# EAGLE board ActuatorBoard (EAGLE 9.6.2)
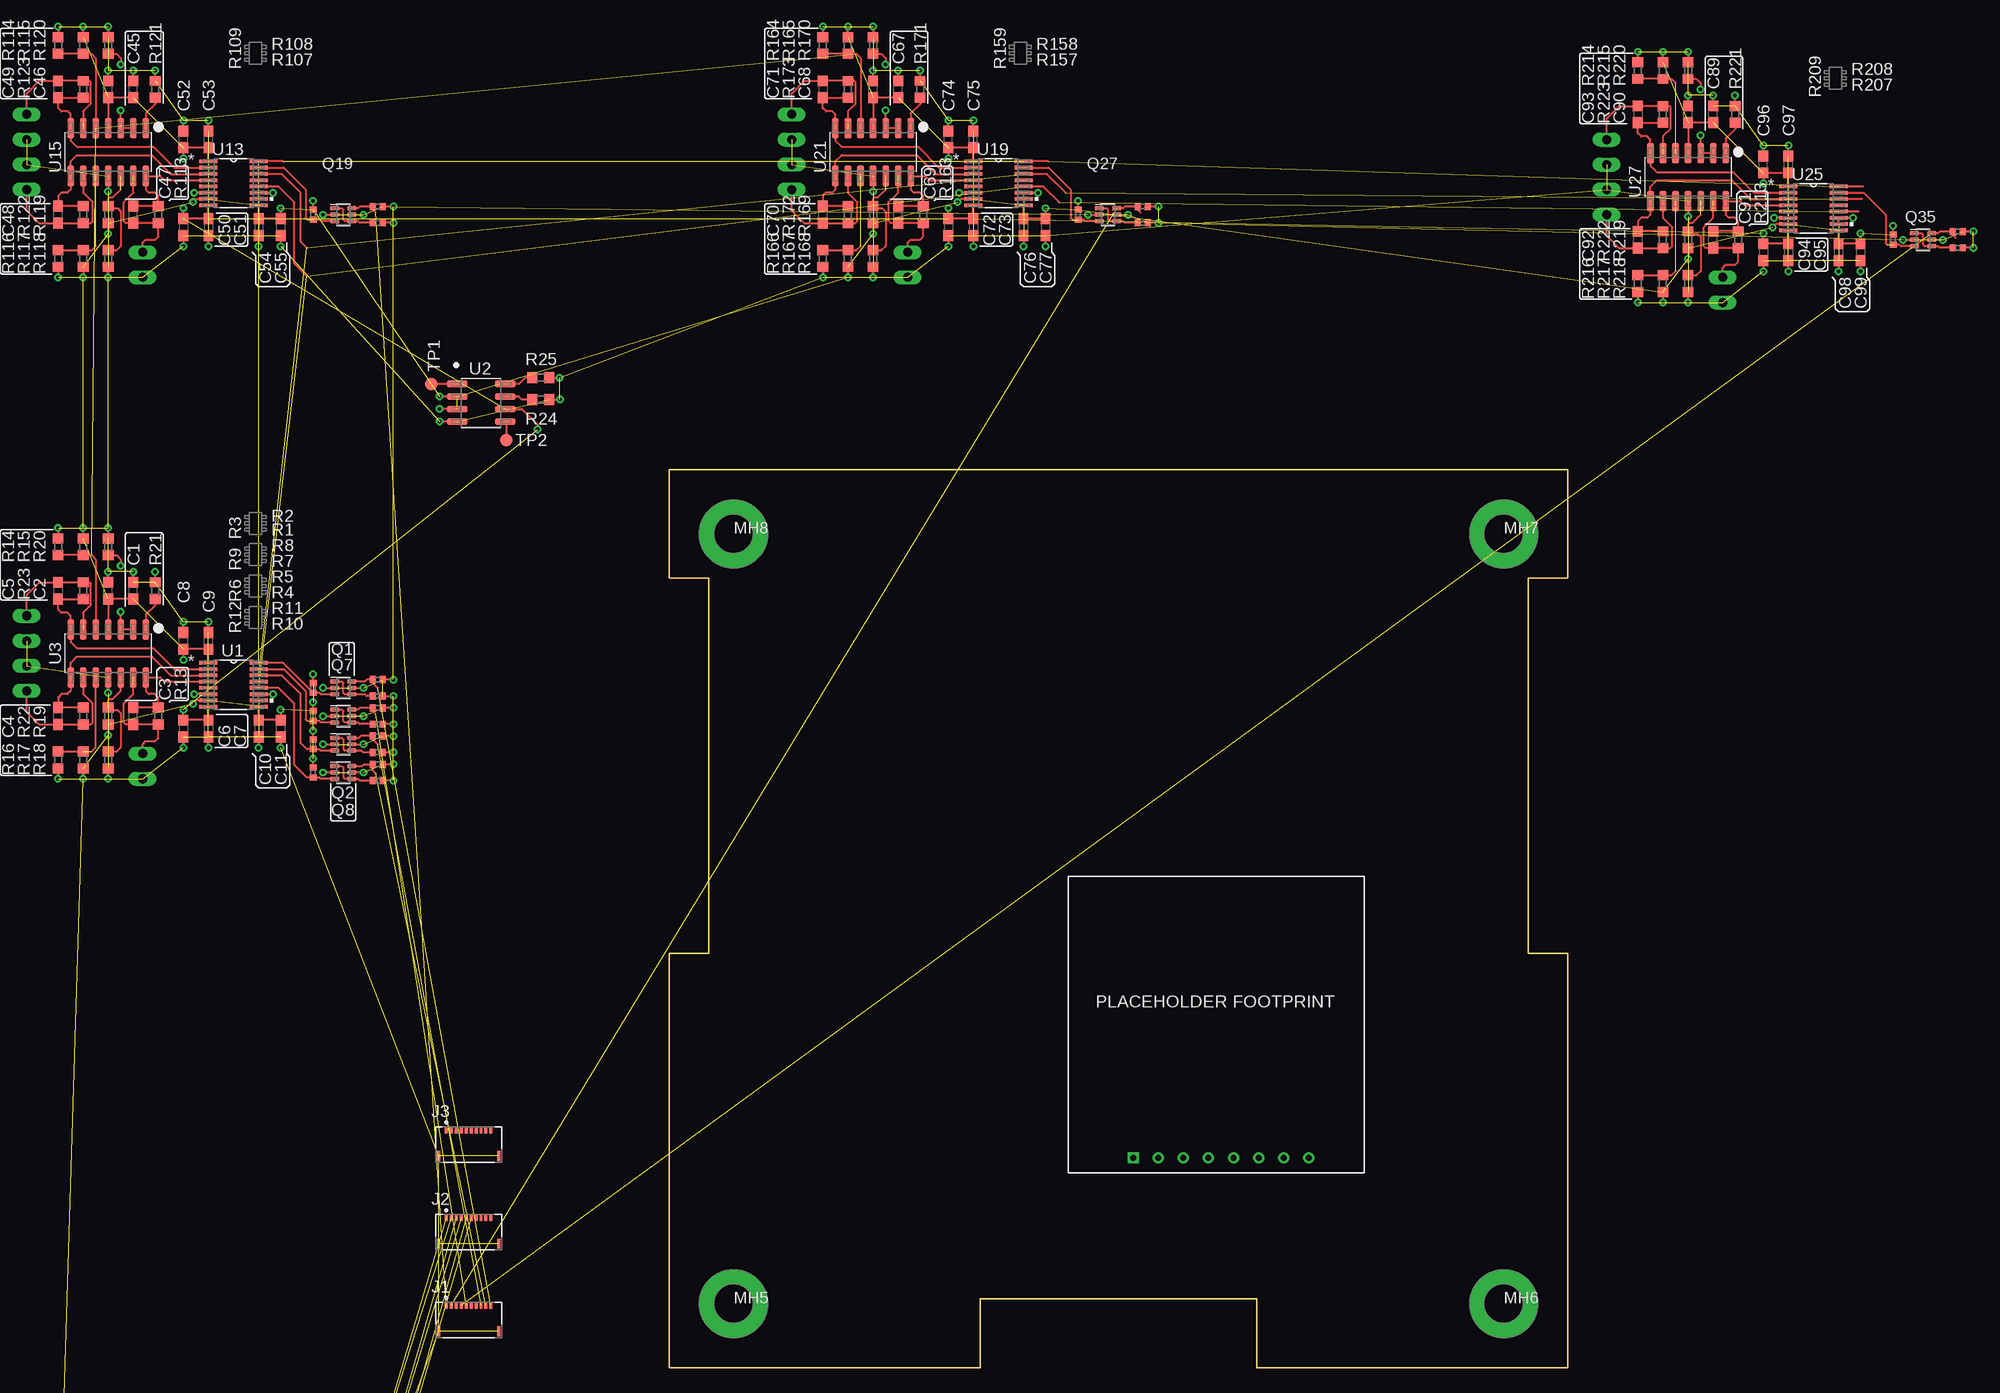
[diagram p0: board, top side]
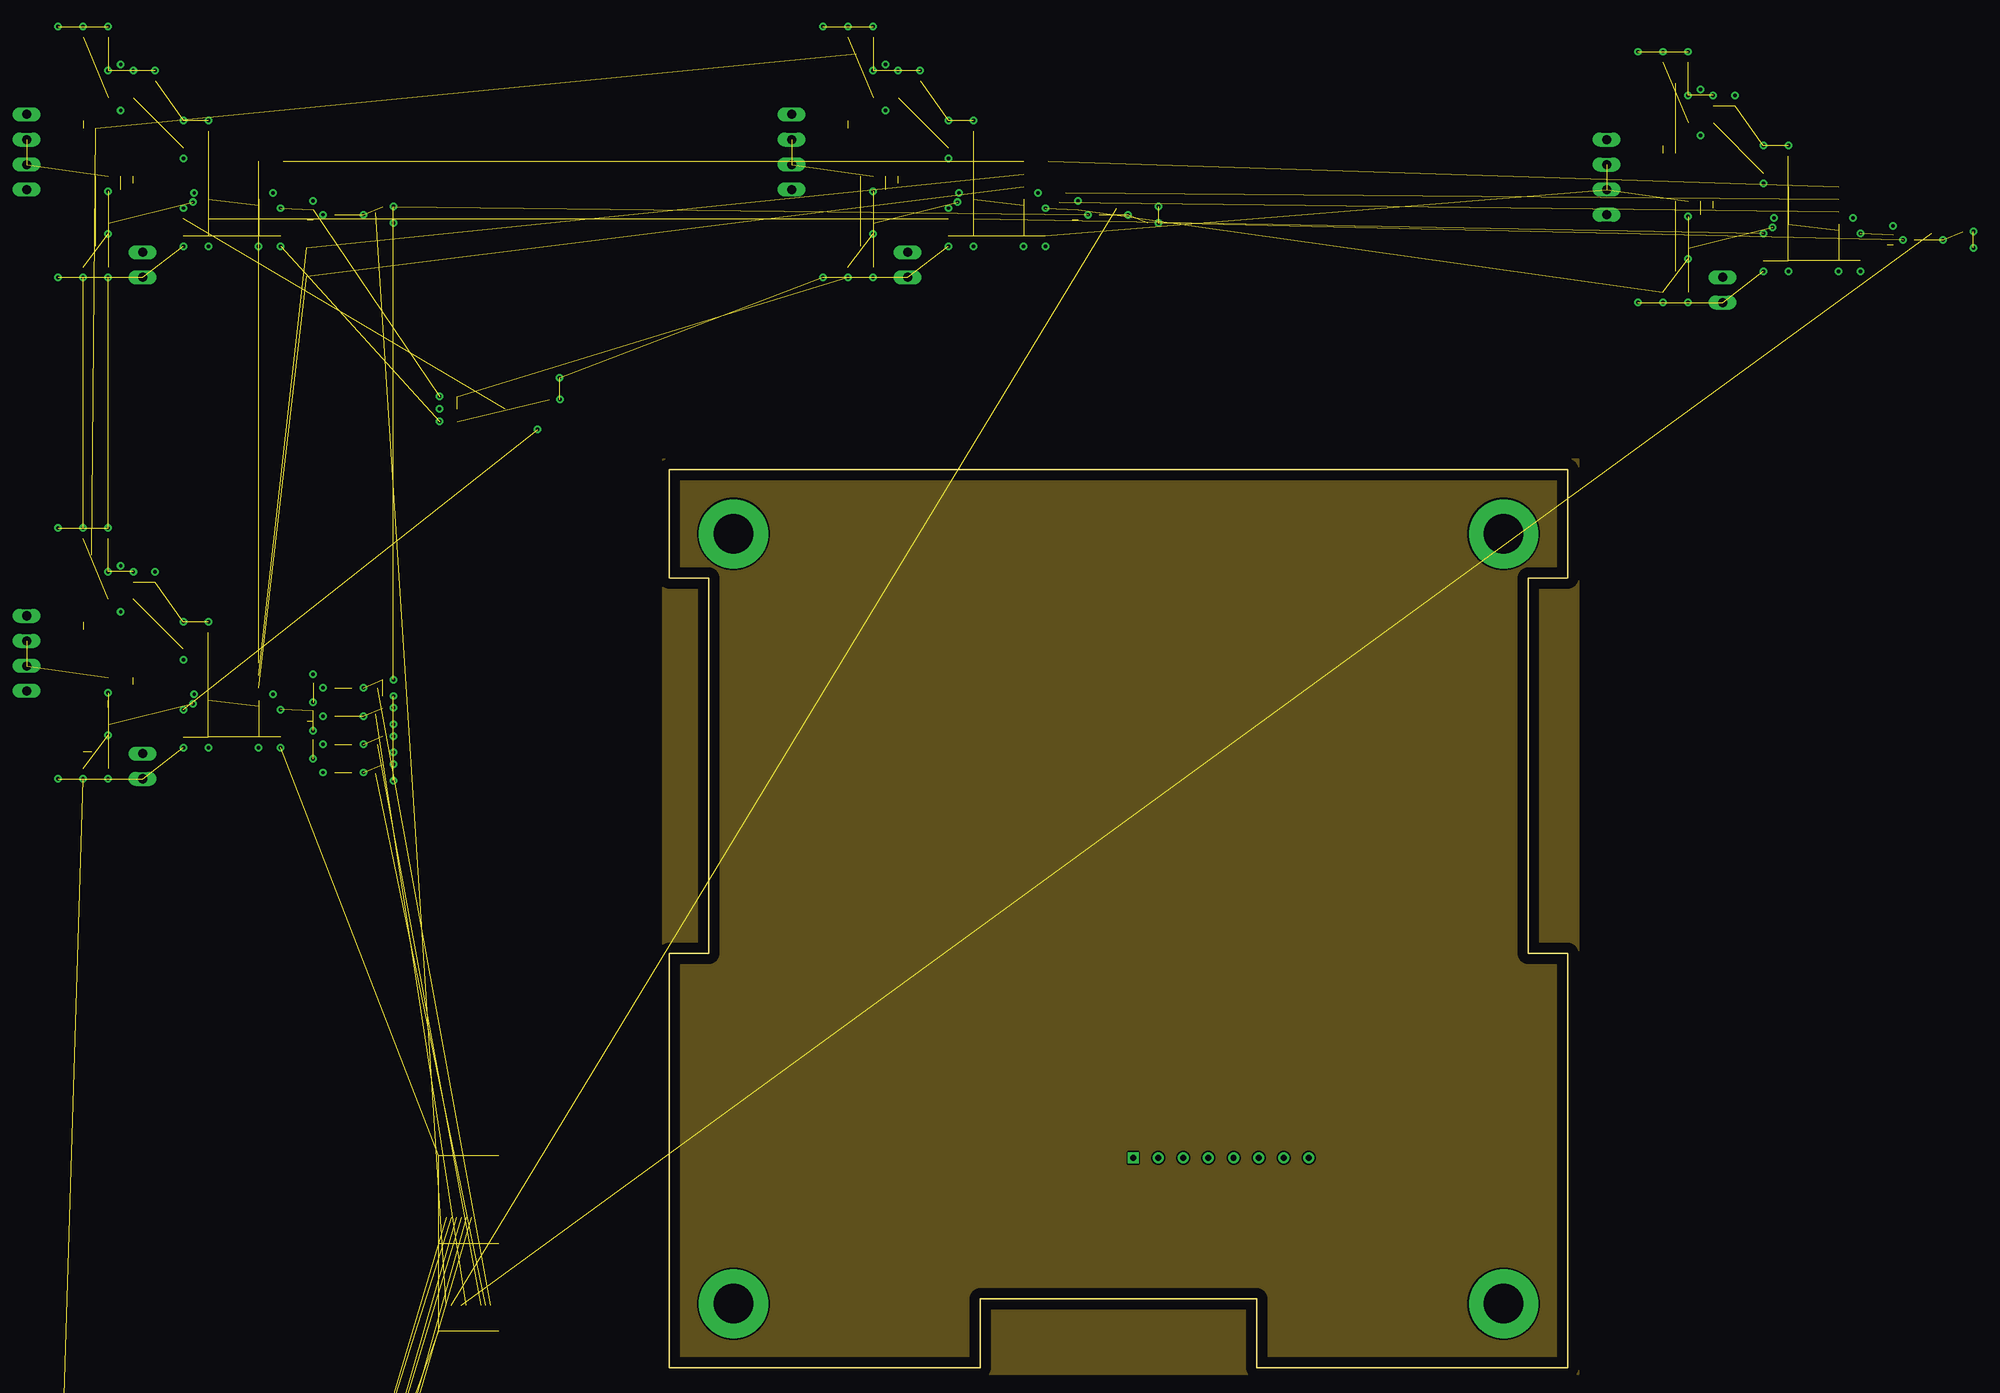
[diagram p1: board, inner layer Route2]
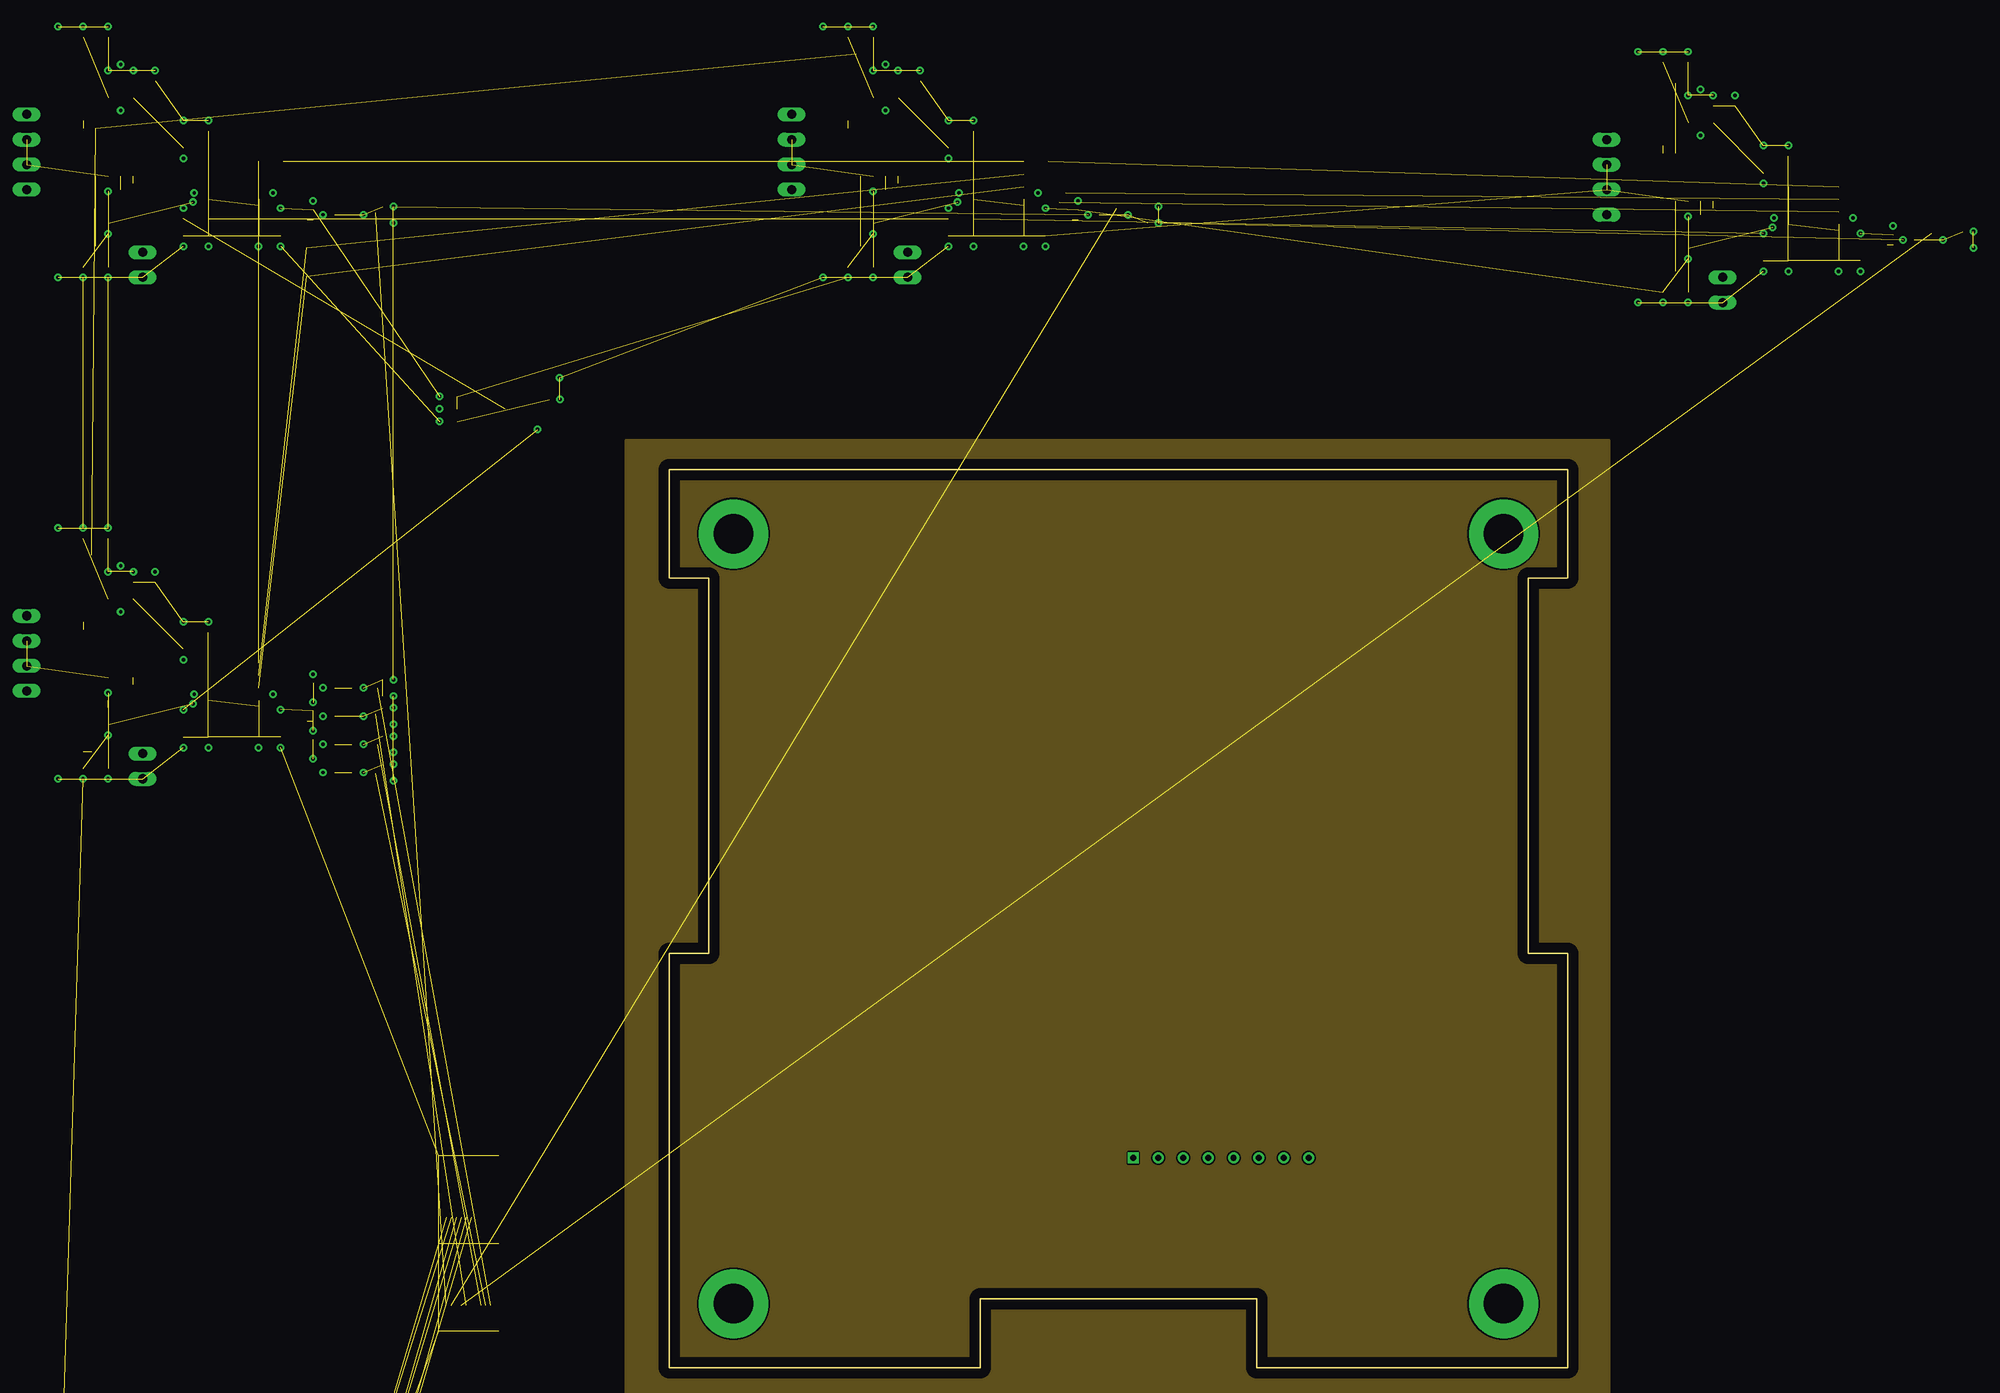
[diagram p2: board, inner layer Route15]
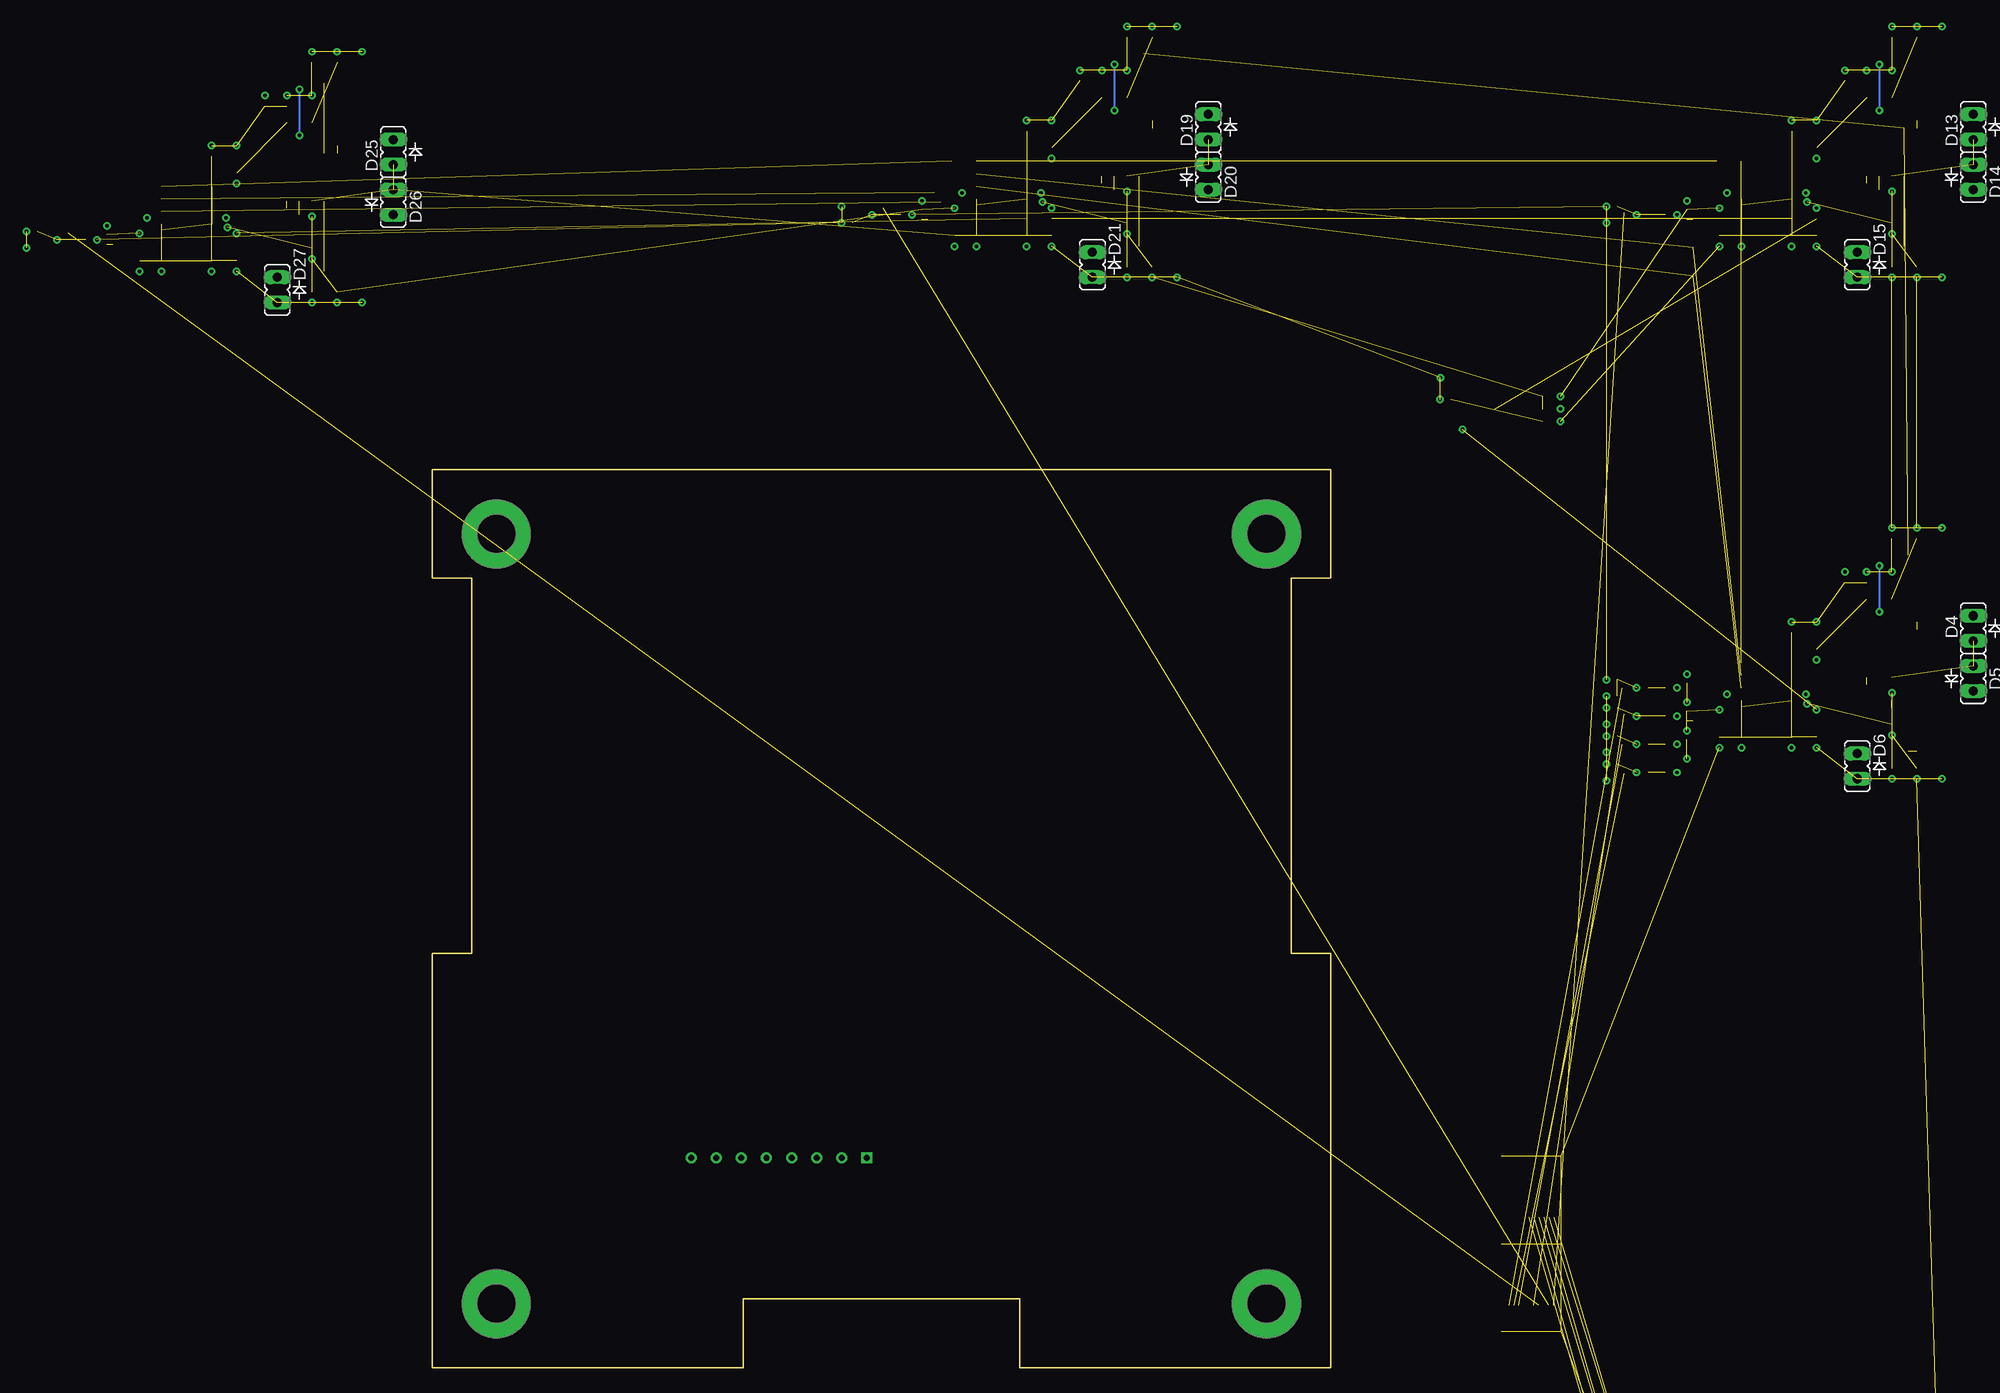
[diagram p3: board, bottom side, seen from below]

Size 91 x 91 mm. Coordinates in mm from the lower left corner, seen from the top.
Outline: 0,0 31.5,0 31.5,7 59.5,7 59.5,0 91,0 91,42 87,42 87,80 91,80 91,91 0,91 0,80 4,80 4,42 0,42 0,0
Copper layers (1*16): Top 0.035mm / dielectric 1.5mm / Bottom 0.035mm
Design rules "default": minimum track width 6mil, minimum drill 0.35mm, track to track 6mil, track to pad 6mil, pad to pad 6mil, via to via 6mil, smd to smd 6mil, copper to edge 40mil, drill to drill 6mil, minimum pad ring 10mil, minimum via ring 8mil, stop-mask expansion 4mil, vias tented up to drill 0mil, thermal gap 10mil
Net classes: 0 Default: width 0.203 mm, drill 0.305 mm, clearance 0.152 mm

## Footprints (pad centres in the part's own frame; a part is rotated, then mirrored left to right if it is on the bottom)
REACTIONWHEEL = drill 0.6 square: 1 5.08,0 | drill 0.6: 2 7.62,0; 3 10.16,0; 4 12.7,0; 5 15.24,0; 6 17.78,0; 7 20.32,0; 8 22.86,0
C0603 = smd 1.1 x 1: 1 -0.85,0; 2 0.85,0
JP1Y_LED_SCREEN = drill 0.914 long: 1 0,-1.27; 2 0,1.27
MOLEX_5034801000 = smd 0.3 x 0.7: 1 -2.25,0; 2 -1.75,0; 3 -1.25,0; 4 -0.75,0; 5 -0.25,0; 6 0.25,0; 7 0.75,0; 8 1.25,0; 9 1.75,0; 10 2.25,0 | smd 0.3 x 1: S1 -3.04,-2.65; S2 3.04,-2.65
JP1 = drill 0.914 long: 1 0,-1.27; 2 0,1.27
NCTR-M002 = smd 1.067 x 2.184: P$1 0,-1.27; P$2 2.54,-1.27
MTGP700H400 = drill 4 pad 7: 1 0,0
SOT23-6P65_200X110L30X25N_BSS138PS,115 = smd 0.39 x 0.96: 1 -0.65,-0.88; 2 0,-0.88; 3 0.65,-0.88; 4 0.65,0.88; 5 0,0.88; 6 -0.65,0.88
R0402 = smd 0.6 x 0.7: 1 -0.5,0; 2 0.5,0
R0603 = smd 1 x 1.1: 1 -0.85,0; 2 0.85,0
B1,27 = smd 1.27 x 1.27: TP 0,0
DBQ16 = smd 1.803 x 0.356: 1 -2.553,2.223; 2 -2.553,1.587; 3 -2.553,0.953; 4 -2.553,0.318; 5 -2.553,-0.318; 6 -2.553,-0.953; 7 -2.553,-1.587; 8 -2.553,-2.223; 9 2.553,-2.223; 10 2.553,-1.587; 11 2.553,-0.953; 12 2.553,-0.318; 13 2.553,0.318; 14 2.553,0.953; 15 2.553,1.587; 16 2.553,2.223
SOIC8P127_490X600X175L83X41N_REF194GSZ-REEL7 = smd 0.66 x 2.07: 1 -1.905,-2.425; 2 -0.635,-2.425; 3 0.635,-2.425; 4 1.905,-2.425; 5 1.905,2.425; 6 0.635,2.425; 7 -0.635,2.425; 8 -1.905,2.425
SOIC14P127_865X600X175L83X41N_TLV9054IDR = smd 0.66 x 2.07: 1 -3.81,-2.425; 2 -2.54,-2.425; 3 -1.27,-2.425; 4 0,-2.425; 5 1.27,-2.425; 6 2.54,-2.425; 7 3.81,-2.425; 8 3.81,2.425; 9 2.54,2.425; 10 1.27,2.425; 11 0,2.425; 12 -1.27,2.425; 13 -2.54,2.425; 14 -3.81,2.425
BD6221F-E2_SOIC8P127_500X620X171L30X42N = smd 0.67 x 1.41: 1 -1.905,-2.9; 2 -0.635,-2.9; 3 0.635,-2.9; 4 1.905,-2.9; 5 1.905,2.9; 6 0.635,2.9; 7 -0.635,2.9; 8 -1.905,2.9

## Placement (x,y rotation side)
A1  REACTION_WHEEL  [REACTIONWHEEL]  41.91,21.27 0 top
A2  REACTION_WHEEL  [REACTIONWHEEL]  -66.67,-62.87 0 top  (outside the outline)
A3  REACTION_WHEEL  [REACTIONWHEEL]  -66.67,-93.03 0 top  (outside the outline)
C1  4.7u  [C0603]  -54.29,78.74 90 top  (outside the outline)
C2  0.1u  [C0603]  -56.83,78.74 90 top  (outside the outline)
C3  9.1p  [C0603]  -54.29,66.04 90 top  (outside the outline)
C4  9.1p  [C0603]  -61.91,66.04 90 top  (outside the outline)
C5  9.1p  [C0603]  -61.91,78.74 270 top  (outside the outline)
C6  1u  [C0603]  -49.21,64.77 270 top  (outside the outline)
C7  0.1u  [C0603]  -46.67,64.77 270 top  (outside the outline)
C8  1u  [C0603]  -49.21,73.66 90 top  (outside the outline)
C9  0.1u  [C0603]  -46.67,73.66 90 top  (outside the outline)
C10  0.1u  [C0603]  -41.59,64.77 270 top  (outside the outline)
C11  1u  [C0603]  -39.37,64.77 270 top  (outside the outline)
C12  0.1u  [C0603]  -66.67,-142.24 0 top  (outside the outline)
C13  0.1u  [C0603]  -66.67,-146.05 0 top  (outside the outline)
C14  0.1u  [C0603]  -66.67,-151.13 0 top  (outside the outline)
C15  0.1u  [C0603]  -66.67,-156.21 0 top  (outside the outline)
C16  0.1u  [C0603]  -66.67,-161.29 0 top  (outside the outline)
C17  0.1u  [C0603]  -66.67,-166.37 0 top  (outside the outline)
C45  4.7u  [C0603]  -54.29,129.54 90 top  (outside the outline)
C46  0.1u  [C0603]  -56.83,129.54 90 top  (outside the outline)
C47  9.1p  [C0603]  -54.29,116.84 90 top  (outside the outline)
C48  9.1p  [C0603]  -61.91,116.84 90 top  (outside the outline)
C49  9.1p  [C0603]  -61.91,129.54 270 top  (outside the outline)
C50  1u  [C0603]  -49.21,115.57 270 top  (outside the outline)
C51  0.1u  [C0603]  -46.67,115.57 270 top  (outside the outline)
C52  1u  [C0603]  -49.21,124.46 90 top  (outside the outline)
C53  0.1u  [C0603]  -46.67,124.46 90 top  (outside the outline)
C54  0.1u  [C0603]  -41.59,115.57 270 top  (outside the outline)
C55  1u  [C0603]  -39.37,115.57 270 top  (outside the outline)
C67  4.7u  [C0603]  23.18,129.54 90 top  (outside the outline)
C68  0.1u  [C0603]  20.64,129.54 90 top  (outside the outline)
C69  9.1p  [C0603]  23.18,116.84 90 top  (outside the outline)
C70  9.1p  [C0603]  15.56,116.84 90 top  (outside the outline)
C71  9.1p  [C0603]  15.56,129.54 270 top  (outside the outline)
C72  1u  [C0603]  28.26,115.57 270 top  (outside the outline)
C73  0.1u  [C0603]  30.8,115.57 270 top  (outside the outline)
C74  1u  [C0603]  28.26,124.46 90 top  (outside the outline)
C75  0.1u  [C0603]  30.8,124.46 90 top  (outside the outline)
C76  0.1u  [C0603]  35.88,115.57 270 top  (outside the outline)
C77  1u  [C0603]  38.1,115.57 270 top  (outside the outline)
C89  4.7u  [C0603]  105.73,127 90 top  (outside the outline)
C90  0.1u  [C0603]  103.19,127 90 top  (outside the outline)
C91  9.1p  [C0603]  105.73,114.3 90 top  (outside the outline)
C92  9.1p  [C0603]  98.11,114.3 90 top  (outside the outline)
C93  9.1p  [C0603]  98.11,127 270 top  (outside the outline)
C94  1u  [C0603]  110.81,113.03 270 top  (outside the outline)
C95  0.1u  [C0603]  113.35,113.03 270 top  (outside the outline)
C96  1u  [C0603]  110.81,121.92 90 top  (outside the outline)
C97  0.1u  [C0603]  113.35,121.92 90 top  (outside the outline)
C98  0.1u  [C0603]  118.43,113.03 270 top  (outside the outline)
C99  1u  [C0603]  120.65,113.03 270 top  (outside the outline)
D4  SFH2430  [JP1Y_LED_SCREEN]  -65.09,74.93 180 bottom  (outside the outline)
D5  SFH2430  [JP1Y_LED_SCREEN]  -65.09,69.85 0 bottom  (outside the outline)
D6  SFH2430  [JP1Y_LED_SCREEN]  -53.34,60.96 180 bottom  (outside the outline)
D13  SFH2430  [JP1Y_LED_SCREEN]  -65.09,125.73 180 bottom  (outside the outline)
D14  SFH2430  [JP1Y_LED_SCREEN]  -65.09,120.65 0 bottom  (outside the outline)
D15  SFH2430  [JP1Y_LED_SCREEN]  -53.34,111.76 180 bottom  (outside the outline)
D19  SFH2430  [JP1Y_LED_SCREEN]  12.38,125.73 180 bottom  (outside the outline)
D20  SFH2430  [JP1Y_LED_SCREEN]  12.38,120.65 0 bottom  (outside the outline)
D21  SFH2430  [JP1Y_LED_SCREEN]  24.13,111.76 180 bottom  (outside the outline)
D25  SFH2430  [JP1Y_LED_SCREEN]  94.93,123.19 180 bottom  (outside the outline)
D26  SFH2430  [JP1Y_LED_SCREEN]  94.93,118.11 0 bottom  (outside the outline)
D27  SFH2430  [JP1Y_LED_SCREEN]  106.68,109.22 180 bottom  (outside the outline)
J1  5034801000  [MOLEX_5034801000]  -20.32,6.35 0 top  (outside the outline)
J2  5034801000  [MOLEX_5034801000]  -20.32,15.24 0 top  (outside the outline)
J3  5034801000  [MOLEX_5034801000]  -20.32,24.13 0 top  (outside the outline)
JP1  [JP1]  -72.39,-165.74 0 top  (outside the outline)
JP2  [JP1]  -79.38,-165.74 0 top  (outside the outline)
JP3  [JP1]  -86.36,-165.74 0 top  (outside the outline)
M1  NCTR-M002  [NCTR-M002]  -56.52,-99.06 0 top  (outside the outline)
M2  NCTR-M002  [NCTR-M002]  -56.52,-106.05 0 top  (outside the outline)
M3  NCTR-M002  [NCTR-M002]  -56.52,-113.03 0 top  (outside the outline)
MH5  MTGP700H400  [MTGP700H400]  6.5,6.5 0 top
MH6  MTGP700H400  [MTGP700H400]  84.5,6.5 0 top
MH7  MTGP700H400  [MTGP700H400]  84.5,84.5 0 top
MH8  MTGP700H400  [MTGP700H400]  6.5,84.5 0 top
Q1  BSS138PS,115  [SOT23-6P65_200X110L30X25N_BSS138PS,115]  -33.02,68.9 270 top  (outside the outline)
Q2  BSS138PS,115  [SOT23-6P65_200X110L30X25N_BSS138PS,115]  -33.02,63.18 270 top  (outside the outline)
Q7  BSS138PS,115  [SOT23-6P65_200X110L30X25N_BSS138PS,115]  -33.02,66.04 270 top  (outside the outline)
Q8  BSS138PS,115  [SOT23-6P65_200X110L30X25N_BSS138PS,115]  -33.02,60.33 270 top  (outside the outline)
Q19  BSS138PS,115  [SOT23-6P65_200X110L30X25N_BSS138PS,115]  -33.02,116.84 270 top  (outside the outline)
Q27  BSS138PS,115  [SOT23-6P65_200X110L30X25N_BSS138PS,115]  44.45,116.84 270 top  (outside the outline)
Q35  BSS138PS,115  [SOT23-6P65_200X110L30X25N_BSS138PS,115]  127,114.3 270 top  (outside the outline)
R1  10k  [R0402]  -29.53,68.07 180 top  (outside the outline)
R2  10k  [R0402]  -29.53,69.72 0 top  (outside the outline)
R3  10k  [R0402]  -36.07,68.9 90 top  (outside the outline)
R4  10k  [R0402]  -29.53,62.36 180 top  (outside the outline)
R5  10k  [R0402]  -29.53,64.01 0 top  (outside the outline)
R6  10k  [R0402]  -36.07,63.18 90 top  (outside the outline)
R7  10k  [R0402]  -29.53,65.21 180 top  (outside the outline)
R8  10k  [R0402]  -29.53,66.87 0 top  (outside the outline)
R9  10k  [R0402]  -36.07,66.04 90 top  (outside the outline)
R10  10k  [R0402]  -29.53,59.5 180 top  (outside the outline)
R11  10k  [R0402]  -29.53,61.15 0 top  (outside the outline)
R12  10k  [R0402]  -36.07,60.33 90 top  (outside the outline)
R13  698k  [R0603]  -51.75,66.04 90 top  (outside the outline)
R14  13.7k  [R0603]  -61.91,83.19 270 top  (outside the outline)
R15  13.7k  [R0603]  -59.37,83.19 90 top  (outside the outline)
R16  13.7k  [R0603]  -61.91,61.59 90 top  (outside the outline)
R17  13.7k  [R0603]  -59.37,61.59 270 top  (outside the outline)
R18  13.7k  [R0603]  -56.83,61.59 90 top  (outside the outline)
R19  13.7k  [R0603]  -56.83,66.04 270 top  (outside the outline)
R20  5.1M  [R0603]  -56.83,83.19 270 top  (outside the outline)
R21  5.1M  [R0603]  -52.07,78.74 90 top  (outside the outline)
R22  698k  [R0603]  -59.37,66.04 90 top  (outside the outline)
R23  698k  [R0603]  -59.37,78.74 270 top  (outside the outline)
R24  5.1M  [R0603]  -13.02,98.11 180 top  (outside the outline)
R25  5.1M  [R0603]  -13.02,100.33 180 top  (outside the outline)
R107  10k  [R0402]  -29.53,116.01 180 top  (outside the outline)
R108  10k  [R0402]  -29.53,117.67 0 top  (outside the outline)
R109  10k  [R0402]  -36.07,116.84 90 top  (outside the outline)
R113  698k  [R0603]  -51.75,116.84 90 top  (outside the outline)
R114  13.7k  [R0603]  -61.91,133.99 270 top  (outside the outline)
R115  13.7k  [R0603]  -59.37,133.99 90 top  (outside the outline)
R116  13.7k  [R0603]  -61.91,112.39 90 top  (outside the outline)
R117  13.7k  [R0603]  -59.37,112.39 270 top  (outside the outline)
R118  13.7k  [R0603]  -56.83,112.39 90 top  (outside the outline)
R119  13.7k  [R0603]  -56.83,116.84 270 top  (outside the outline)
R120  5.1M  [R0603]  -56.83,133.99 270 top  (outside the outline)
R121  5.1M  [R0603]  -52.07,129.54 90 top  (outside the outline)
R122  698k  [R0603]  -59.37,116.84 90 top  (outside the outline)
R123  698k  [R0603]  -59.37,129.54 270 top  (outside the outline)
R157  10k  [R0402]  47.94,116.01 180 top  (outside the outline)
R158  10k  [R0402]  47.94,117.67 0 top  (outside the outline)
R159  10k  [R0402]  41.4,116.84 90 top  (outside the outline)
R163  698k  [R0603]  25.72,116.84 90 top  (outside the outline)
R164  13.7k  [R0603]  15.56,133.99 270 top  (outside the outline)
R165  13.7k  [R0603]  18.1,133.99 90 top  (outside the outline)
R166  13.7k  [R0603]  15.56,112.39 90 top  (outside the outline)
R167  13.7k  [R0603]  18.1,112.39 270 top  (outside the outline)
R168  13.7k  [R0603]  20.64,112.39 90 top  (outside the outline)
R169  13.7k  [R0603]  20.64,116.84 270 top  (outside the outline)
R170  5.1M  [R0603]  20.64,133.99 270 top  (outside the outline)
R171  5.1M  [R0603]  25.4,129.54 90 top  (outside the outline)
R172  698k  [R0603]  18.1,116.84 90 top  (outside the outline)
R173  698k  [R0603]  18.1,129.54 270 top  (outside the outline)
R207  10k  [R0402]  130.49,113.47 180 top  (outside the outline)
R208  10k  [R0402]  130.49,115.13 0 top  (outside the outline)
R209  10k  [R0402]  123.95,114.3 90 top  (outside the outline)
R213  698k  [R0603]  108.27,114.3 90 top  (outside the outline)
R214  13.7k  [R0603]  98.11,131.44 270 top  (outside the outline)
R215  13.7k  [R0603]  100.65,131.44 90 top  (outside the outline)
R216  13.7k  [R0603]  98.11,109.86 90 top  (outside the outline)
R217  13.7k  [R0603]  100.65,109.86 270 top  (outside the outline)
R218  13.7k  [R0603]  103.19,109.86 90 top  (outside the outline)
R219  13.7k  [R0603]  103.19,114.3 270 top  (outside the outline)
R220  5.1M  [R0603]  103.19,131.44 270 top  (outside the outline)
R221  5.1M  [R0603]  107.95,127 90 top  (outside the outline)
R222  698k  [R0603]  100.65,114.3 90 top  (outside the outline)
R223  698k  [R0603]  100.65,127 270 top  (outside the outline)
TP1  TPB1,27  [B1,27]  -24.13,99.69 90 top  (outside the outline)
TP2  TPB1,27  [B1,27]  -16.51,93.98 180 top  (outside the outline)
U1  ADS7841E_2K5  [DBQ16]  -44.13,69.22 0 top  (outside the outline)
U2  REF194GSZ-REEL7  [SOIC8P127_490X600X175L83X41N_REF194GSZ-REEL7]  -19.05,97.79 270 top  (outside the outline)
U3  TLV9054IDR  [SOIC14P127_865X600X175L83X41N_TLV9054IDR]  -56.83,72.39 180 top  (outside the outline)
U4  BD621F-E2  [BD6221F-E2_SOIC8P127_500X620X171L30X42N]  -65.41,-119.38 0 top  (outside the outline)
U5  BD621F-E2  [BD6221F-E2_SOIC8P127_500X620X171L30X42N]  -65.41,-127.64 0 top  (outside the outline)
U6  BD621F-E2  [BD6221F-E2_SOIC8P127_500X620X171L30X42N]  -65.41,-135.89 0 top  (outside the outline)
U13  ADS7841E_2K5  [DBQ16]  -44.13,120.02 0 top  (outside the outline)
U15  TLV9054IDR  [SOIC14P127_865X600X175L83X41N_TLV9054IDR]  -56.83,123.19 180 top  (outside the outline)
U19  ADS7841E_2K5  [DBQ16]  33.34,120.02 0 top  (outside the outline)
U21  TLV9054IDR  [SOIC14P127_865X600X175L83X41N_TLV9054IDR]  20.64,123.19 180 top  (outside the outline)
U25  ADS7841E_2K5  [DBQ16]  115.89,117.47 0 top  (outside the outline)
U27  TLV9054IDR  [SOIC14P127_865X600X175L83X41N_TLV9054IDR]  103.19,120.65 180 top  (outside the outline)

## Library data of the parts
A1-A3 D4-D6 D13-D15 D19-D21 D25-D27 M1-M3 MH5-MH8 Q1 Q2 Q7 Q8 Q19 Q27 Q35 U2-U6 U15 U21 U27 = my_library
C1-C17 C45-C55 C67-C77 C89-C99 = rcl; SPICEPREFIX: C
J1-J3 = my_library; DESCRIPTION: 10 Position FFC, FPC Connector Contacts, Top and Bottom 0.020 (0.50mm) Surface Mount, Right Angle; DIGI-KEY_PART_NUMBER: WM1389CT-ND; MF: Molex; MP: 5034801000; PACKAGE: None; PURCHASE-URL: https://pricing.snapeda.com/search/part/5034801000/?ref=eda
JP1-JP3 = jumper
R1-R25 R107-R109 R113-R123 R157-R159 R163-R173 R207-R209 R213-R223 = rcl; SPICEPREFIX: R
TP1 TP2 = testpad
U1 U13 U19 U25 = my_library; DATASHEET_URL: http://www.ti.com/lit/gpn/ADS7841; DESCRIPTION: 12-Bit, 4-Channel Serial Output Sampling Analog-to-Digital Converter; FAMILY_NAME: PRECISION ADC (<=10MSPS); GENERIC_PART_NUMBER: ADS7841; INDUSTRY_STD_PKG_TYPE: SSOP/QSOP; MANUFACTURER: Texas Instruments; PACKAGE_DESIGNATOR: DBQ; PIN_COUNT: 16

## Nets
5V_!CS!_SUN_X+: Q19.3 R109.1 U13.15
5V_!CS!_SUN_X-: Q27.3 R159.1 U19.15
5V_!CS!_SUN_Y+: Q35.3 R209.1 U25.15
5V_!CS!_SUN_Y-: Q7.3 R9.1 U1.15
5V_SPI_CLK: Q1.3 R3.1 U1.16 U13.16 U19.16 U25.16
5V_SPI_MISO: Q8.3 R12.1 U1.12 U13.12 U19.12 U25.12
5V_SPI_MOSI: Q2.3 R6.1 U1.14 U13.14 U19.14 U25.14
!CS!_SUN_X+: J1.1 Q19.6 R108.1
!CS!_SUN_X-: J1.2 Q27.6 R158.1
!CS!_SUN_Y+: J1.4 Q35.6 R208.1
!CS!_SUN_Y-: J1.5 Q7.6 R8.1
!CS!_SUN_Z-: J1.3
+3V3: Q1.2 Q1.5 Q2.2 Q2.5 Q7.2 Q7.5 Q8.2 Q8.5 Q19.2 Q19.5 Q27.2 Q27.5 Q35.2 Q35.5 R1.1 R2.2 R4.1 R5.2 R7.1 R8.2 R10.1 R11.2 R107.1 R108.2 R157.1 R158.2 R207.1 R208.2
+4V5: C6.1 C7.1 C50.1 C51.1 C72.1 C73.1 C94.1 C95.1 U1.8 U2.6 U13.8 U19.8 U25.8
+5V: C1.1 C2.1 C8.1 C9.1 C10.1 C11.1 C12.1 C13.2 C14.1 C15.2 C16.1 C17.2 C45.1 C46.1 C52.1 C53.1 C54.1 C55.1 C67.1 C68.1 C74.1 C75.1 C76.1 C77.1 C89.1 C90.1 C96.1 C97.1 C98.1 C99.1 R3.2 R6.2 R9.2 R12.2 R15.2 R17.2 R19.2 R109.2 R115.2 R117.2 R119.2 R159.2 R165.2 R167.2 R169.2 R209.2 R215.2 R217.2 R219.2 U1.1 U1.7 U1.9 U2.2 U2.3 U3.4 U4.2 U4.3 U4.6 U5.2 U5.3 U5.6 U6.2 U6.3 U6.6 U13.1 U13.7 U13.9 U15.4 U19.1 U19.7 U19.9 U21.4 U25.1 U25.7 U25.9 U27.4
GND: C1.2 C2.2 C6.2 C7.2 C8.2 C9.2 C10.2 C11.2 C12.2 C13.1 C14.2 C15.1 C16.2 C17.1 C45.2 C46.2 C50.2 C51.2 C52.2 C53.2 C54.2 C55.2 C67.2 C68.2 C72.2 C73.2 C74.2 C75.2 C76.2 C77.2 C89.2 C90.2 C94.2 C95.2 C96.2 C97.2 C98.2 C99.2 D4.2 D5.2 D6.2 D13.2 D14.2 D15.2 D19.2 D20.2 D21.2 D25.2 D26.2 D27.2 J1.S1 J1.S2 J2.S1 J2.S2 J3.S1 J3.S2 R14.1 R16.1 R18.1 R20.1 R21.2 R24.1 R25.1 R114.1 R116.1 R118.1 R120.1 R121.2 R164.1 R166.1 R168.1 R170.1 R171.2 R214.1 R216.1 R218.1 R220.1 R221.2 U1.6 U1.10 U1.11 U2.4 U3.11 U4.8 U5.8 U6.8 U13.6 U13.10 U13.11 U15.11 U19.6 U19.10 U19.11 U21.11 U25.6 U25.10 U25.11 U27.11
IN2+BIAS: U3.5 U15.5 U21.5
MAG_X_FIN: J2.1 U4.4
MAG_X_RIN: J2.2 U4.5
MAG_Y_FIN: J2.3 U5.4
MAG_Y_RIN: J2.4 U5.5
MAG_Z_FIN: J2.5 U6.4
MAG_Z_RIN: J2.6 U6.5
N$1: J3.10
N$2: J3.9
N$3: J3.8
N$4: J3.6
N$5: J3.7
N$6: J1.6
N$7: J1.7
N$8: J3.5
N$9: J3.4
N$10: J3.2
N$11: J3.1
N$12: J3.3
N$13: Q1.1 Q1.4 R1.2
N$15: Q2.1 Q2.4 R4.2
N$16: Q7.1 Q7.4 R7.2
N$17: J2.7
N$18: J2.8
N$19: J2.9
N$20: J2.10
N$21: Q8.1 Q8.4 R10.2
N$22: R20.2 U3.2 U3.3
N$23: R21.1 U3.1
N$24: C3.1 D6.1 R13.1 U3.13
N$25: C4.1 D5.1 R22.1 U3.9
N$26: M1.P$2 U4.7
N$27: JP2.2 U5.1
N$28: M2.P$2 U5.7
N$29: C5.1 D4.1 R23.1 U3.6
N$30: JP2.1 M2.P$1
N$31: JP1.1 M1.P$1
N$32: M3.P$2 U6.7
N$35: TP2.TP U2.5
N$36: TP1.TP U2.1
N$37: R24.2 U2.7
N$38: R25.2 U2.8
N$42: JP1.2 U4.1
N$43: JP3.2 U6.1
N$44: JP3.1 M3.P$1
N$71: Q19.1 Q19.4 R107.2
N$73: R120.2 U15.2 U15.3
N$74: R121.1 U15.1
N$75: C47.1 D15.1 R113.1 U15.13
N$76: C48.1 D14.1 R122.1 U15.9
N$77: C49.1 D13.1 R123.1 U15.6
N$97: Q27.1 Q27.4 R157.2
N$99: R170.2 U21.2 U21.3
N$100: R171.1 U21.1
N$101: C69.1 D21.1 R163.1 U21.13
N$102: C70.1 D20.1 R172.1 U21.9
N$103: C71.1 D19.1 R173.1 U21.6
N$123: Q35.1 Q35.4 R207.2
N$125: R220.2 U27.2 U27.3
N$126: R221.1 U27.1
N$127: C91.1 D27.1 R213.1 U27.13
N$128: C92.1 D26.1 R222.1 U27.9
N$129: C93.1 D25.1 R223.1 U27.6
UCB0_SPI_CLK: J1.10 Q1.6 R2.1
UCB0_SPI_MISO: J1.9 Q8.6 R11.1
UCB0_SPI_MOSI: J1.8 Q2.6 R5.1
X+_0_DEGREES: C49.2 R123.2 U13.2 U15.7
X+_120_DEGREES: C48.2 R122.2 U13.3 U15.8
X+_240_DEGREES: C47.2 R113.2 U13.4 U15.14
X+_IN2+BIAS: R114.2 R115.1
X+_IN3+BIAS: R116.2 R117.1 U15.10
X+_IN4+BIAS: R118.2 R119.1 U15.12
X-_0_DEGREES: C71.2 R173.2 U19.2 U21.7
X-_120_DEGREES: C70.2 R172.2 U19.3 U21.8
X-_240_DEGREES: C69.2 R163.2 U19.4 U21.14
X-_IN2+BIAS: R164.2 R165.1
X-_IN3+BIAS: R166.2 R167.1 U21.10
X-_IN4+BIAS: R168.2 R169.1 U21.12
Y+_0_DEGREES: C93.2 R223.2 U25.2 U27.7
Y+_120_DEGREES: C92.2 R222.2 U25.3 U27.8
Y+_240_DEGREES: C91.2 R213.2 U25.4 U27.14
Y+_IN2+BIAS: R214.2 R215.1 U27.5
Y+_IN3+BIAS: R216.2 R217.1 U27.10
Y+_IN4+BIAS: R218.2 R219.1 U27.12
Y-_0_DEGREES: C5.2 R23.2 U1.2 U3.7
Y-_120_DEGREES: C4.2 R22.2 U1.3 U3.8
Y-_240_DEGREES: C3.2 R13.2 U1.4 U3.14
Y-_IN2+BIAS: R14.2 R15.1
Y-_IN3+BIAS: R16.2 R17.1 U3.10
Y-_IN4+BIAS: R18.2 R19.1 U3.12

## Tracks (layer width: path | path; a pad name or v marks a point on that pad's centre or on a via)
5V_!CS!_SUN_X+  (1 unrouted)
  Top 0.203: -34.28,116.19 Q19.3 -35.23,116.19 -35.24,116.21 -35.31,116.21 -35.45,116.34 R109.1 | U13.15 -39.05,121.6 -36.83,119.38 -36.83,116.52 -36.65,116.34
5V_!CS!_SUN_X-  (1 unrouted)
  Top 0.203: 43.19,116.19 Q27.3 42.24,116.19 42.23,116.21 42.16,116.21 42.02,116.34 R159.1 | U19.15 38.42,121.6 40.64,119.38 40.64,116.52 40.82,116.34
5V_!CS!_SUN_Y+  (1 unrouted)
  Top 0.203: 125.74,113.65 Q35.3 124.79,113.65 124.78,113.67 124.71,113.67 124.57,113.8 R209.1 | U25.15 120.97,119.06 123.19,116.84 123.19,113.98 123.37,113.8
5V_!CS!_SUN_Y-  (1 unrouted)
  Top 0.203: -34.28,65.39 Q7.3 -35.23,65.39 -35.24,65.41 -35.31,65.41 -35.45,65.54 R9.1 | U1.15 -39.05,70.8 -36.83,68.58 -36.83,65.72 -36.65,65.54
5V_SPI_CLK  (3 unrouted)
  Top 0.203: Q1.3 -35.23,68.25 -35.24,68.27 -35.31,68.27 -35.45,68.4 R3.1 -39.11,71.44 U1.16 | -39.11,122.24 U13.16 | 38.36,122.24 U19.16 | 120.91,119.7 U25.16
5V_SPI_MISO  (3 unrouted)
  Top 0.203: Q8.3 -33.92,59.69 -35.31,59.69 -35.45,59.83 R12.1 -36.71,59.83 -37.98,61.09 -37.98,67.31 -39.57,68.89 U1.12 | -36.71,110.62 -37.98,111.89 -37.98,118.11 -39.57,119.69 U13.12 | U19.12 37.9,119.69 39.49,118.11 | U25.12 120.45,117.16
5V_SPI_MOSI  (3 unrouted)
  Top 0.203: Q2.3 -33.92,62.55 -35.31,62.55 -35.45,62.68 R6.1 -36.71,62.68 -37.34,63.3 -37.34,68.27 -39.24,70.17 U1.14 | U13.14 -39.24,120.97 -37.34,119.06 -37.34,114.11 -36.71,113.48 | 40.13,119.06 38.23,120.97 U19.14 | 120.78,118.43 U25.14
!CS!_SUN_X+  (1 unrouted)
  Top 0.203: Q19.6 -31.5,117.49 -31.33,117.67 R108.1 -30.03,117.34 -29.74,117.05
!CS!_SUN_X-  (1 unrouted)
  Top 0.203: Q27.6 45.97,117.49 46.14,117.67 R158.1 47.44,117.34 47.73,117.05
!CS!_SUN_Y+  (1 unrouted)
  Top 0.203: Q35.6 128.51,114.95 128.69,115.13 R208.1 129.99,114.8 130.28,114.51
!CS!_SUN_Y-  (1 unrouted)
  Top 0.203: Q7.6 -31.5,66.69 -31.33,66.86 R8.1 -30.03,66.54 -29.74,66.25
+3V1
  pour Route15 (rank 6, no thermals): -4.45,93.98 -4.45,-3.81 95.25,-3.81 95.25,92.71 95.25,93.98
+3V3  (via drill 0.35)  (31 unrouted)
  Top 0.203: v-27.94,69.72 R2.2 | R1.1 v-27.94,68.07 | Q1.5 v-30.99,68.9 | v-35.05,68.9 Q1.2 | v-27.94,65.22 R7.1 | v-27.94,66.86 R8.2 | v-35.05,66.04 Q7.2 | v-35.05,63.18 Q2.2 | Q2.5 v-30.99,63.18 | v-27.94,64.01 R5.2 | v-27.94,62.36 R4.1 | Q8.2 v-35.05,60.33 | v-27.94,59.5 R10.1 | v-30.99,60.33 Q8.5 | v-27.94,61.15 R11.2 | v-27.94,116.01 R107.1 | v-27.94,117.67 R108.2 | v-35.05,116.84 Q19.2 | v49.53,116.01 R157.1 | v49.53,117.67 R158.2 | v42.42,116.84 Q27.2 | v132.08,113.47 R207.1 | v132.08,115.13 R208.2 | v124.97,114.3 Q35.2
  other vias: -30.99,66.04 -30.99,116.84 46.48,116.84 129.03,114.3
+4V5  (via drill 0.35)  (4 unrouted)
  Top 0.152: -46.67,66.98 U1.8 | -46.67,117.78 U13.8 | 30.8,117.78 U19.8 | 113.35,115.24 U25.8
  Top 0.203: v-49.21,66.7 C6.1 C7.1 -46.67,66.98 | U2.6 -14.92,97.16 -13.34,95.57 v-13.34,95.07 | v-49.21,117.5 C50.1 C51.1 -46.67,117.78 | v28.26,117.5 C72.1 C73.1 30.8,117.78 | v110.81,114.96 C94.1 C95.1 113.35,115.24
+5V  (via drill 0.35)  (51 unrouted)
  Top 0.152: -46.69,72.8 C9.1 | -46.69,123.6 C53.1 | 30.79,123.6 C75.1 | 113.33,121.06 C97.1
  Top 0.203: R17.2 v-59.37,59.69 | R15.2 v-59.37,85.09 | C1.1 C2.1 U3.4 | U1.1 -46.69,72.8 | v-49.21,71.73 C8.1 C9.1 | v-39.37,66.7 C11.1 C10.1 -41.59,66.98 U1.9 | U2.2 v-23.26,98.42 | U2.3 v-23.26,97.16 | U1.7 -47.94,67.63 v-48.26,67.31 | R19.2 v-56.83,64.11 | R3.2 v-36.07,70.28 | R9.2 v-36.07,67.42 | R12.2 v-36.07,61.71 | R6.2 v-36.07,64.56 | R117.2 v-59.37,110.49 | R115.2 v-59.37,135.89 | C45.1 C46.1 U15.4 | U13.1 -46.69,123.6 | v-49.21,122.53 C52.1 C53.1 | v-39.37,117.5 C55.1 C54.1 -41.59,117.78 U13.9 | U13.7 -47.94,118.43 v-48.26,118.11 | R119.2 v-56.83,114.91 | R109.2 v-36.07,118.22 | R167.2 v18.1,110.49 | R165.2 v18.1,135.89 | C67.1 C68.1 U21.4 | U19.1 30.79,123.6 | v28.26,122.53 C74.1 C75.1 | v38.1,117.5 C77.1 C76.1 35.88,117.78 U19.9 | U19.7 29.53,118.43 v29.21,118.11 | R169.2 v20.64,114.91 | R159.2 v41.4,118.22 | R217.2 v100.65,107.95 | R215.2 v100.65,133.35 | C89.1 C90.1 U27.4 | U25.1 113.33,121.06 | v110.81,119.99 C96.1 C97.1 | v120.65,114.96 C99.1 C98.1 118.43,115.24 U25.9 | U25.7 112.08,115.89 v111.76,115.57 | R219.2 v103.19,112.37 | R209.2 v123.95,115.68
GND  (via drill 0.35)  (93 unrouted)
  Top 0.203: R16.1 v-61.91,59.69 | v-56.83,59.69 R18.1 | v-56.83,85.09 R20.1 | v-61.91,85.09 R14.1 | U3.11 v-56.83,68.4 | C9.2 v-46.67,75.59 | C8.2 v-49.21,75.59 | C11.2 v-39.37,62.84 | C10.2 v-41.59,62.84 | U2.4 v-23.26,95.89 | v-40.15,68.26 U1.11 U1.10 | U1.6 v-48.12,68.26 | R25.1 v-11.11,100.33 | R24.1 v-11.09,98.11 | C1.2 v-54.29,80.67 | C2.2 v-56.83,80.67 | C6.2 v-49.21,62.84 | v-46.67,62.84 C7.2 | R21.2 v-52.07,80.67 | R116.1 v-61.91,110.49 | v-56.83,110.49 R118.1 | v-56.83,135.89 R120.1 | v-61.91,135.89 R114.1 | U15.11 v-56.83,119.2 | C53.2 v-46.67,126.39 | C52.2 v-49.21,126.39 | C55.2 v-39.37,113.64 | C54.2 v-41.59,113.64 | v-40.15,119.06 U13.11 U13.10 | U13.6 v-48.12,119.06 | C45.2 v-54.29,131.47 | C46.2 v-56.83,131.47 | C50.2 v-49.21,113.64 | v-46.67,113.64 C51.2 | R121.2 v-52.07,131.47 | R166.1 v15.56,110.49 | v20.64,110.49 R168.1 | v20.64,135.89 R170.1 | v15.56,135.89 R164.1 | U21.11 v20.64,119.2 | C75.2 v30.8,126.39 | C74.2 v28.26,126.39 | C77.2 v38.1,113.64 | C76.2 v35.88,113.64 | v37.32,119.06 U19.11 U19.10 | U19.6 v29.35,119.06 | C67.2 v23.18,131.47 | C68.2 v20.64,131.47 | C72.2 v28.26,113.64 | v30.8,113.64 C73.2 | R171.2 v25.4,131.47 | R216.1 v98.11,107.95 | v103.19,107.95 R218.1 | v103.19,133.35 R220.1 | v98.11,133.35 R214.1 | U27.11 v103.19,116.66 | C97.2 v113.35,123.85 | C96.2 v110.81,123.85 | C99.2 v120.65,111.1 | C98.2 v118.43,111.1 | v119.87,116.52 U25.11 U25.10 | U25.6 v111.9,116.52 | C89.2 v105.73,128.93 | C90.2 v103.19,128.93 | C94.2 v110.81,111.1 | v113.35,111.1 C95.2 | R221.2 v107.95,128.93
GND2
  pour Route2 (no thermals): -0.64,92.08 92.08,92.08 92.08,-0.64 -0.64,-0.64
IN2+BIAS  (2 unrouted)
  Top 0.203: -58.52,82.33 -58.1,81.92 U3.5 | -58.52,133.13 -58.1,132.72 U15.5 | 18.95,133.13 19.37,132.72 U21.5
MAG_X_FIN  (1 unrouted)
MAG_X_RIN  (1 unrouted)
MAG_Y_FIN  (1 unrouted)
MAG_Y_RIN  (1 unrouted)
MAG_Z_FIN  (1 unrouted)
MAG_Z_RIN  (1 unrouted)
N$13
  Top 0.203: R1.2 -30.66,68.07 -30.84,68.25 Q1.4 -32.88,68.25 -33.02,68.39 -33.02,69.41 -33.16,69.55 Q1.1
N$15
  Top 0.203: Q2.1 -33.16,63.83 -33.02,63.69 -33.02,62.67 -32.88,62.53 Q2.4 -31.19,62.53 -31.01,62.36 R4.2
N$16
  Top 0.203: Q7.1 -33.16,66.69 -33.02,66.55 -33.02,65.53 -32.88,65.39 Q7.4 -31.5,65.39 -31.33,65.22 R7.2
N$21
  Top 0.203: Q8.1 -33.16,60.98 -33.02,60.83 -33.02,59.82 -32.88,59.67 Q8.4 -31.5,59.67 -31.33,59.5 R10.2
N$22  (via drill 0.35)
  Top 0.203: R20.2 -55.98,82.33 -55.56,81.92 v-55.56,81.28 | U3.3 -55.56,74.93 | -55.56,74.93 v-55.56,76.6 | U3.2 -55.45,74.81 -55.56,74.93
  Bottom 0.203: v-55.56,81.28 v-55.56,76.6
N$23
  Top 0.203: U3.1 -53.02,76.3 -52.07,77.25 R21.1
N$24  (1 unrouted)
  Top 0.203: -54.29,69.22 -54.29,68.26 -55.24,67.31 -55.24,65.41 -55.03,65.19 C3.1 R13.1 -51.75,63.82 -52.07,63.5 -53.02,63.5 -53.34,63.18 D6.1
N$25
  Top 0.152: R22.1 -58.95,65.19
  Top 0.203: U3.9 -59.37,68.26 -58.42,67.31 -58.42,65.41 -58.63,65.19 R22.1 C4.1 -63.82,65.19 -65.09,66.46 D5.1
N$26  (1 unrouted)
N$27  (1 unrouted)
N$28  (1 unrouted)
N$29  (1 unrouted)
  Top 0.152: R23.1 | -59.38,79.37 -59.37,79.37 | U3.6
  Top 0.203: -59.38,79.37 R23.1 | -59.37,75.56 -59.37,76.52 -58.59,77.3 -58.59,79.45 -58.74,79.59 R23.1 C5.1 -63.82,79.59 -65.04,78.37 -65.09,78.32 D4.1
N$30  (1 unrouted)
N$31  (1 unrouted)
N$32  (1 unrouted)
N$35
  Top 0.203: U2.5 -16.51,95.77 TP2.TP
N$36
  Top 0.203: U2.1 TP1.TP
N$37
  Top 0.203: R24.2 -14.92,98.11 -15.24,98.42 U2.7
N$38
  Top 0.203: U2.8 -15.24,99.69 -14.61,100.33 R25.2
N$42  (1 unrouted)
N$43  (1 unrouted)
N$44  (1 unrouted)
N$71
  Top 0.203: Q19.1 -33.16,117.49 -33.02,117.35 -33.02,116.33 -32.88,116.19 Q19.4 -31.5,116.19 -31.33,116.01 R107.2
N$73  (via drill 0.35)
  Top 0.203: R120.2 -55.98,133.13 -55.56,132.72 v-55.56,132.08 | U15.3 -55.56,125.73 | -55.56,125.73 v-55.56,127.4 | U15.2 -55.45,125.61 -55.56,125.73
  Bottom 0.203: v-55.56,132.08 v-55.56,127.4
N$74
  Top 0.203: U15.1 -53.02,127.1 -52.07,128.06 R121.1
N$75  (1 unrouted)
  Top 0.203: -54.29,120.02 -54.29,119.06 -55.24,118.11 -55.24,116.2 -55.03,115.99 C47.1 R113.1 -51.75,114.62 -52.07,114.3 -53.02,114.3 -53.34,113.98 D15.1
N$76
  Top 0.152: R122.1 -58.95,115.99
  Top 0.203: U15.9 -59.37,119.06 -58.42,118.11 -58.42,116.2 -58.63,115.99 R122.1 C48.1 -63.82,115.99 -65.09,117.26 D14.1
N$77  (1 unrouted)
  Top 0.152: R123.1 | -59.38,130.17 -59.37,130.17 | U15.6
  Top 0.203: -59.38,130.17 R123.1 | -59.37,126.36 -59.37,127.32 -58.59,128.09 -58.59,130.25 -58.74,130.39 R123.1 C49.1 -63.82,130.39 -65.04,129.17 -65.09,129.12 D13.1
N$97
  Top 0.203: Q27.1 44.31,117.49 44.45,117.35 44.45,116.33 44.59,116.19 Q27.4 45.97,116.19 46.14,116.01 R157.2
N$99  (via drill 0.35)
  Top 0.203: R170.2 21.49,133.13 21.91,132.72 v21.91,132.08 | U21.3 21.91,125.73 | 21.91,125.73 v21.91,127.4 | U21.2 22.02,125.61 21.91,125.73
  Bottom 0.203: v21.91,132.08 v21.91,127.4
N$100
  Top 0.203: U21.1 24.45,127.1 25.4,128.06 R171.1
N$101  (1 unrouted)
  Top 0.203: 23.18,120.02 23.18,119.06 22.23,118.11 22.23,116.2 22.44,115.99 C69.1 R163.1 25.72,114.62 25.4,114.3 24.45,114.3 24.13,113.98 D21.1
N$102
  Top 0.152: R172.1 18.52,115.99
  Top 0.203: U21.9 18.1,119.06 19.05,118.11 19.05,116.2 18.84,115.99 R172.1 C70.1 13.65,115.99 12.38,117.26 D20.1
N$103  (1 unrouted)
  Top 0.152: R173.1 | 18.09,130.17 18.1,130.17 | U21.6
  Top 0.203: 18.09,130.17 R173.1 | 18.1,126.36 18.1,127.32 18.88,128.09 18.88,130.25 18.73,130.39 R173.1 C71.1 13.65,130.39 12.43,129.17 12.38,129.12 D19.1
N$123
  Top 0.203: Q35.1 126.86,114.95 127,114.81 127,113.79 127.14,113.65 Q35.4 128.51,113.65 128.69,113.47 R207.2
N$125  (via drill 0.35)
  Top 0.203: R220.2 104.04,130.59 104.46,130.18 v104.46,129.54 | U27.3 104.46,123.19 | 104.46,123.19 v104.46,124.86 | U27.2 104.57,123.08 104.46,123.19
  Bottom 0.203: v104.46,129.54 v104.46,124.86
N$126
  Top 0.203: U27.1 107,124.56 107.95,125.52 R221.1
N$127  (1 unrouted)
  Top 0.203: 105.73,117.47 105.73,116.52 104.78,115.57 104.78,113.67 104.99,113.45 C91.1 R213.1 108.27,112.08 107.95,111.76 107,111.76 106.68,111.44 D27.1
N$128
  Top 0.152: R222.1 101.07,113.45
  Top 0.203: U27.9 100.65,116.52 101.6,115.57 101.6,113.67 101.39,113.45 R222.1 C92.1 96.2,113.45 94.93,114.72 D26.1
N$129  (1 unrouted)
  Top 0.152: R223.1 | 100.64,127.63 100.65,127.63 | U27.6
  Top 0.203: 100.64,127.63 R223.1 | 100.65,123.83 100.65,124.78 101.43,125.56 101.43,127.71 101.28,127.85 R223.1 C93.1 96.2,127.85 94.98,126.63 94.93,126.58 D25.1
UCB0_SPI_CLK  (1 unrouted)
  Top 0.203: Q1.6 -30.84,69.55 -30.66,69.72 R2.1 -30.03,69.4 -29.53,68.9
UCB0_SPI_MISO  (1 unrouted)
  Top 0.203: Q8.6 -31.11,60.98 -30.94,61.15 R11.1 | R11.1 -29.9,61.28 | -29.71,60.2 -30.03,60.52 R11.1
UCB0_SPI_MOSI  (1 unrouted)
  Top 0.203: Q2.6 -31.43,63.83 -31.26,64.01 R5.1 | R5.1 -30.35,64.01 | -29.53,63.18 -30.03,63.68 R5.1
X+_0_DEGREES
  Top 0.203: U13.2 -50.16,121.6 -52.27,123.71 -60.01,123.71 -60.64,124.34 U15.7 -60.64,127 -60.96,127.32 -61.59,127.32 -61.91,127.64 C49.2 R123.2
X+_120_DEGREES
  Top 0.203: R122.2 C48.2 -61.91,118.75 -61.59,119.06 -60.96,119.06 -60.64,119.38 U15.8 -60.64,122.24 -60.01,122.87 -52.4,122.87 -50.49,120.97 U13.3
X+_240_DEGREES
  Top 0.152: C47.2 -54.61,118.01
  Top 0.203: C47.2 R113.2 -51.75,118.75 -52.07,119.06 -52.7,119.06 -53.02,119.38 U15.14 -51.54,120.77 -51.1,120.33 U13.4
X+_IN2+BIAS
  Top 0.203: R115.1 R114.2
X+_IN3+BIAS  (1 unrouted)
  Top 0.203: -58.1,113.67 -58.52,113.25 R117.1 R116.2
X+_IN4+BIAS  (1 unrouted)
  Top 0.203: R118.2 -55.98,113.25 -55.56,113.67 -55.56,117.16 -55.88,117.47 -56.62,117.47 R119.1 -56.83,118.43 -56.67,118.59 -56.35,118.59 -55.56,119.38
X-_0_DEGREES
  Top 0.203: U19.2 27.3,121.6 25.2,123.71 17.46,123.71 16.83,124.34 U21.7 16.83,127 16.51,127.32 15.88,127.32 15.56,127.64 C71.2 R173.2
X-_120_DEGREES
  Top 0.203: R172.2 C70.2 15.56,118.75 15.88,119.06 16.51,119.06 16.83,119.38 U21.8 16.83,122.24 17.46,122.87 25.07,122.87 26.98,120.97 U19.3
X-_240_DEGREES
  Top 0.152: C69.2 22.86,118.01
  Top 0.203: C69.2 R163.2 25.72,118.75 25.4,119.06 24.77,119.06 24.45,119.38 U21.14 25.93,120.77 26.37,120.33 U19.4
X-_IN2+BIAS
  Top 0.203: R165.1 R164.2
X-_IN3+BIAS  (1 unrouted)
  Top 0.203: 19.37,113.67 18.95,113.25 R167.1 R166.2
X-_IN4+BIAS  (1 unrouted)
  Top 0.203: R168.2 21.49,113.25 21.91,113.67 21.91,117.16 21.59,117.47 20.85,117.47 R169.1 20.64,118.43 20.8,118.59 21.12,118.59 21.91,119.38
Y+_0_DEGREES
  Top 0.203: U25.2 109.86,119.06 107.75,121.17 100.01,121.17 99.38,121.81 U27.7 99.38,124.46 99.06,124.78 98.42,124.78 98.11,125.09 C93.2 R223.2
Y+_120_DEGREES
  Top 0.203: R222.2 C92.2 98.11,116.2 98.42,116.52 99.06,116.52 99.38,116.84 U27.8 99.38,119.7 100.01,120.33 107.62,120.33 109.53,118.43 U25.3
Y+_240_DEGREES
  Top 0.152: C91.2 105.41,115.47
  Top 0.203: C91.2 R213.2 108.27,116.2 107.95,116.52 107.31,116.52 107,116.84 U27.14 108.48,118.22 108.92,117.79 U25.4
Y+_IN2+BIAS  (1 unrouted)
  Top 0.203: R214.2 R215.1 101.5,130.59 101.92,130.18
Y+_IN3+BIAS  (1 unrouted)
  Top 0.203: 101.92,111.12 101.5,110.7 R217.1 R216.2
Y+_IN4+BIAS  (1 unrouted)
  Top 0.203: R218.2 104.04,110.7 104.46,111.12 104.46,114.62 104.14,114.94 103.4,114.94 R219.1 103.19,115.89 103.35,116.05 103.67,116.05 104.46,116.84
Y-_0_DEGREES
  Top 0.203: U1.2 -50.16,70.8 -52.27,72.91 -60.01,72.91 -60.64,73.55 U3.7 -60.64,76.2 -60.96,76.52 -61.59,76.52 -61.91,76.83 C5.2 R23.2
Y-_120_DEGREES
  Top 0.203: R22.2 C4.2 -61.91,67.94 -61.59,68.26 -60.96,68.26 -60.64,68.58 U3.8 -60.64,71.44 -60.01,72.07 -52.4,72.07 -50.49,70.17 U1.3
Y-_240_DEGREES
  Top 0.152: C3.2 -54.61,67.21
  Top 0.203: C3.2 R13.2 -51.75,67.94 -52.07,68.26 -52.7,68.26 -53.02,68.58 U3.14 -51.54,69.97 -51.1,69.53 U1.4
Y-_IN2+BIAS
  Top 0.203: R15.1 R14.2
Y-_IN3+BIAS  (1 unrouted)
  Top 0.203: R16.2 R17.1 | -58.52,62.45 -58.1,62.87 U3.10
Y-_IN4+BIAS  (1 unrouted)
  Top 0.203: R18.2 -55.98,62.45 -55.56,62.87 -55.56,66.36 -55.88,66.67 -56.62,66.67 R19.1 | U3.12 -55.56,68.58 -56.35,67.79 -56.67,67.79 -56.83,67.63

## Text on the board
tDocu: Q19 | Q6 | Q6 | LORIS ADCS ACTUATOR BOARD - REV A | Q3 | Q6 | Q5 | Q4
_tDocu: Dalhousie Space Systems Lab